# Altium PCB PCB.PcbDoc
Units mil, origin at the board's own origin, x right, y up, seen from the top; angles counter-clockwise.
Board outline 2007.87 x 1771.65 mil, 2 copper layers (Top Layer, Bottom Layer); 44 components, 59 nets, 178 pads, 19 vias.
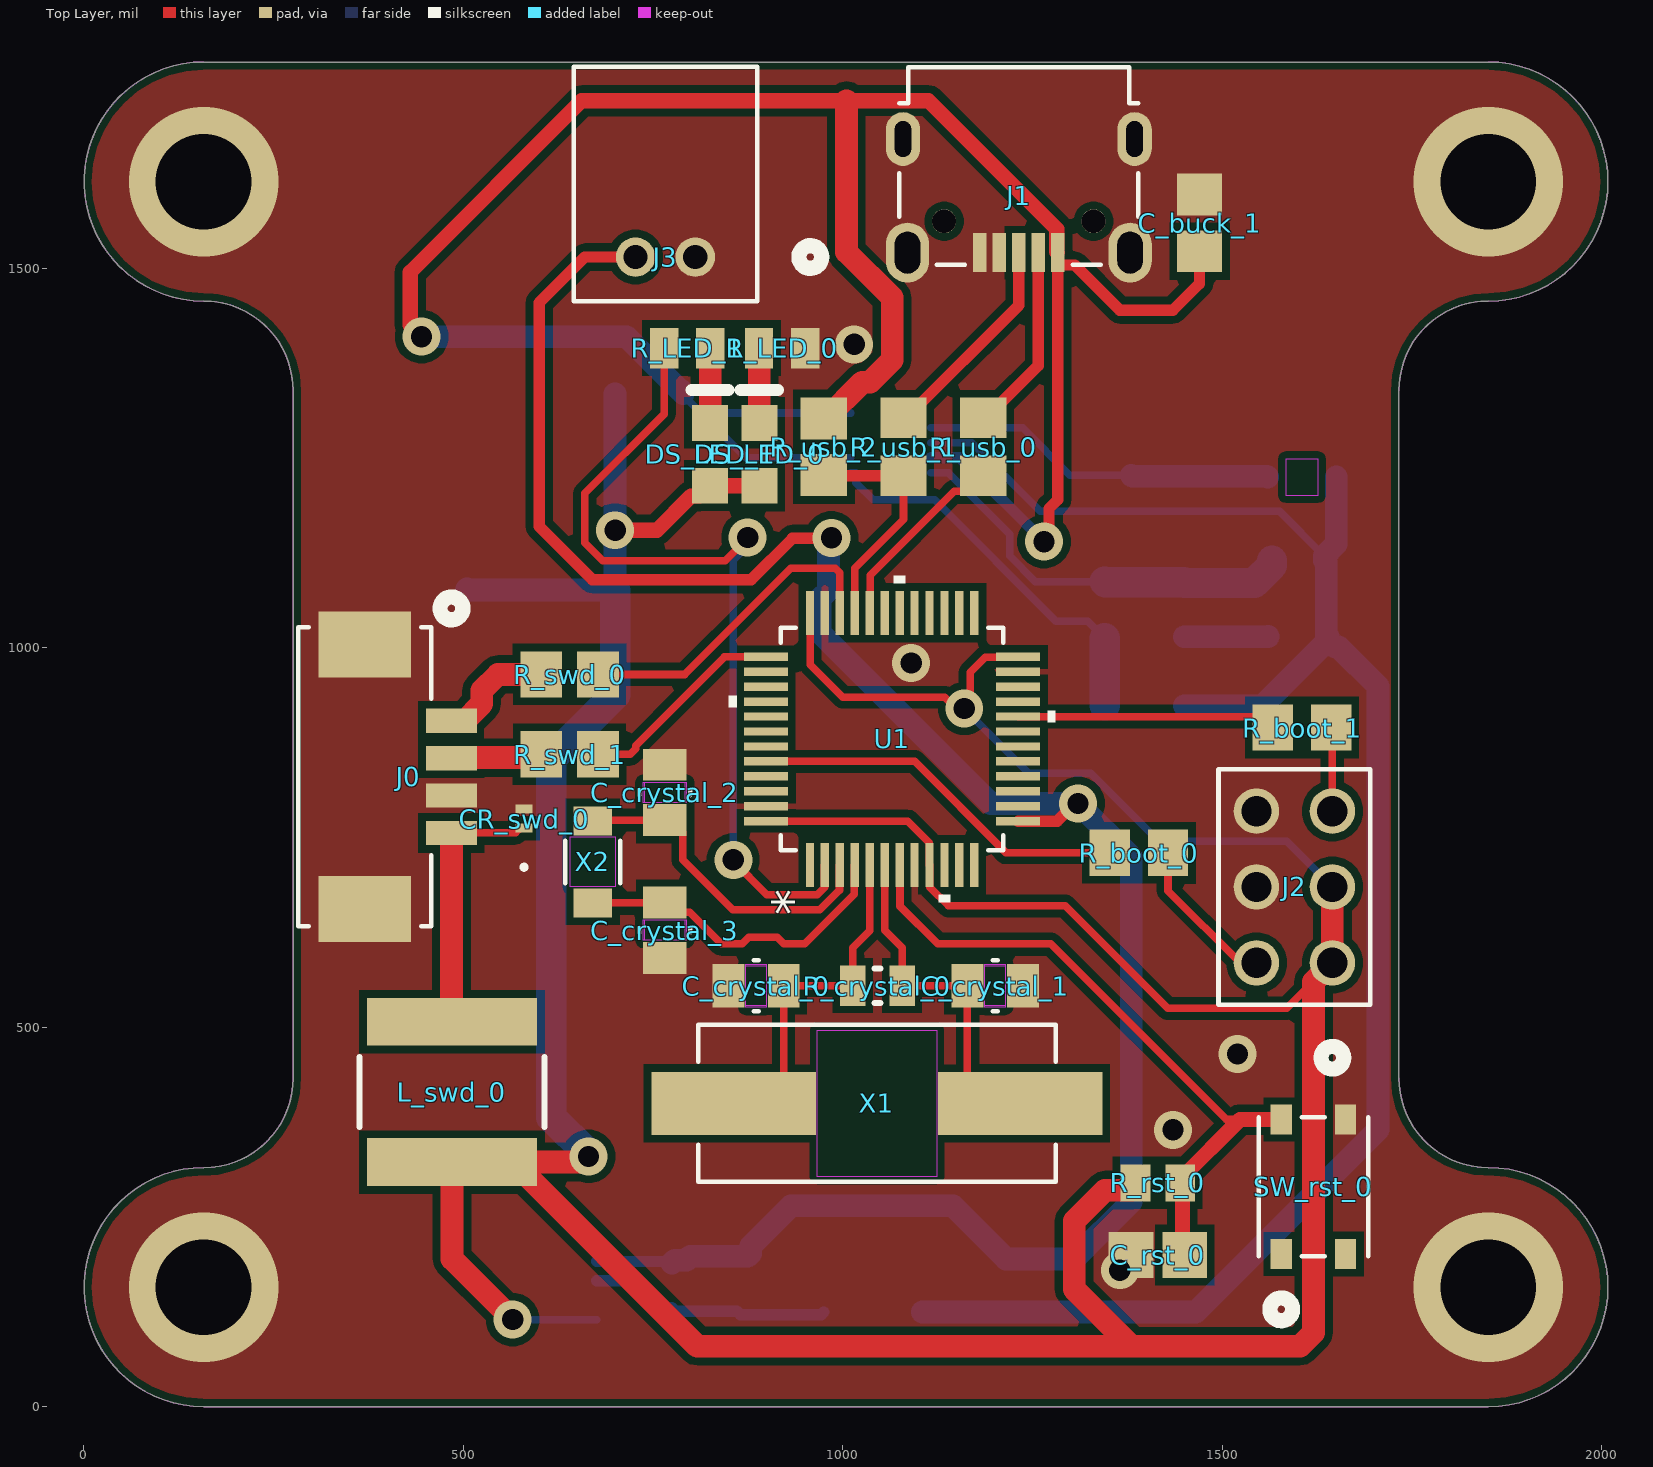
[diagram p0: Top Layer view]
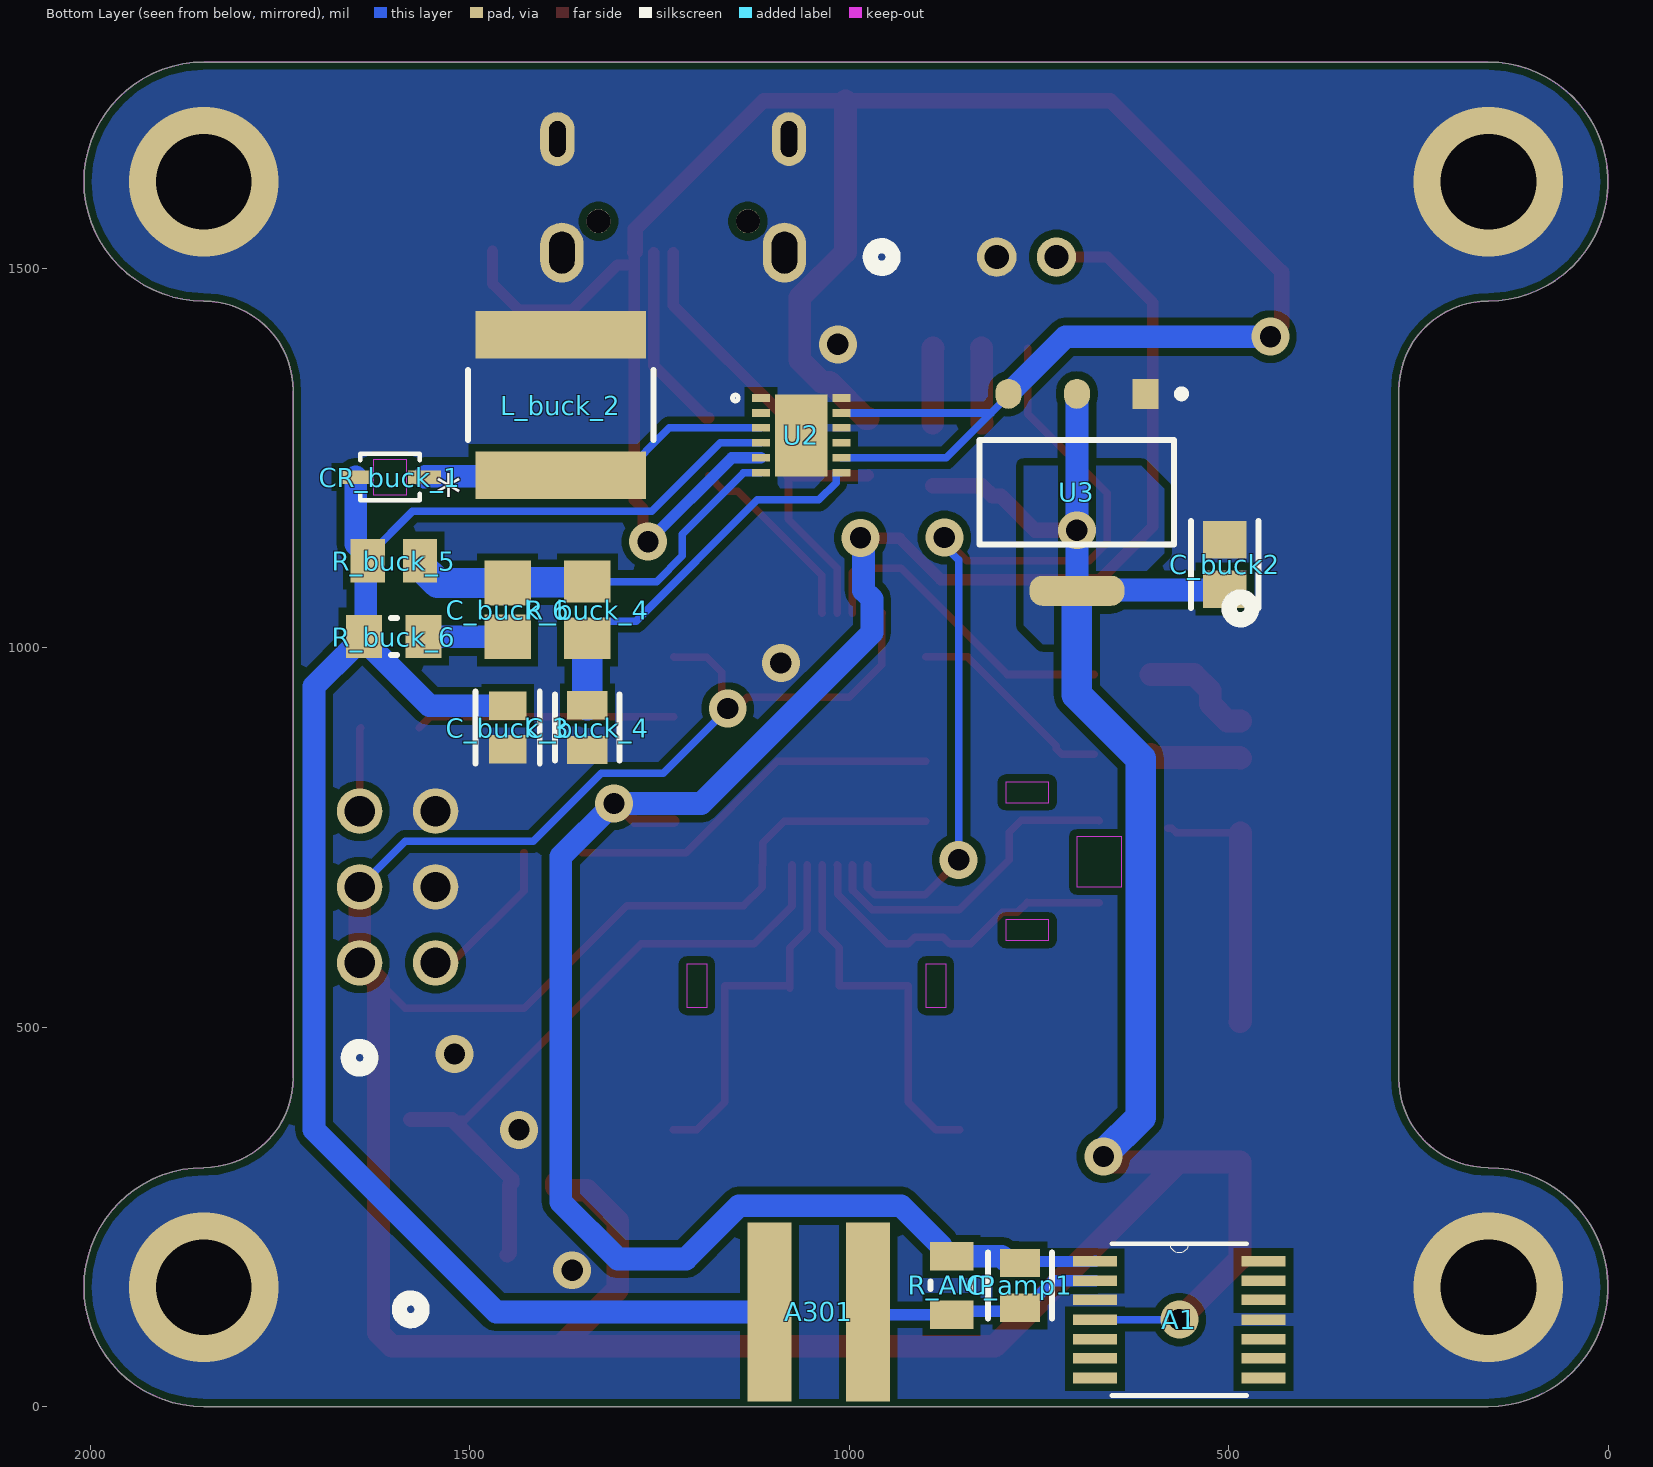
[diagram p1: Bottom Layer view, seen from below]
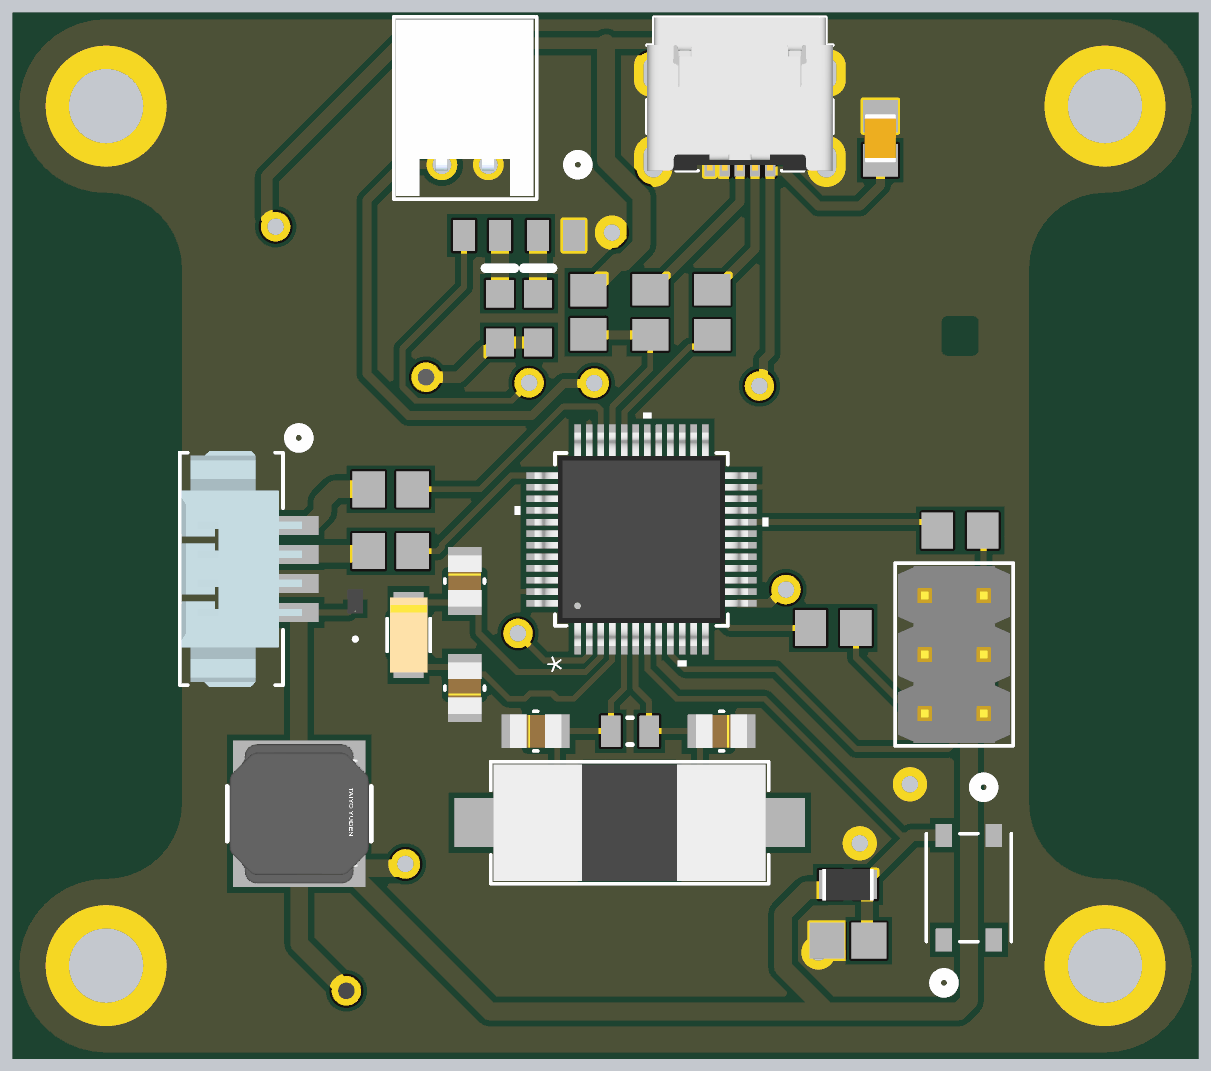
[diagram p2: 3D render of the assembled board from above, using the file's embedded part models]
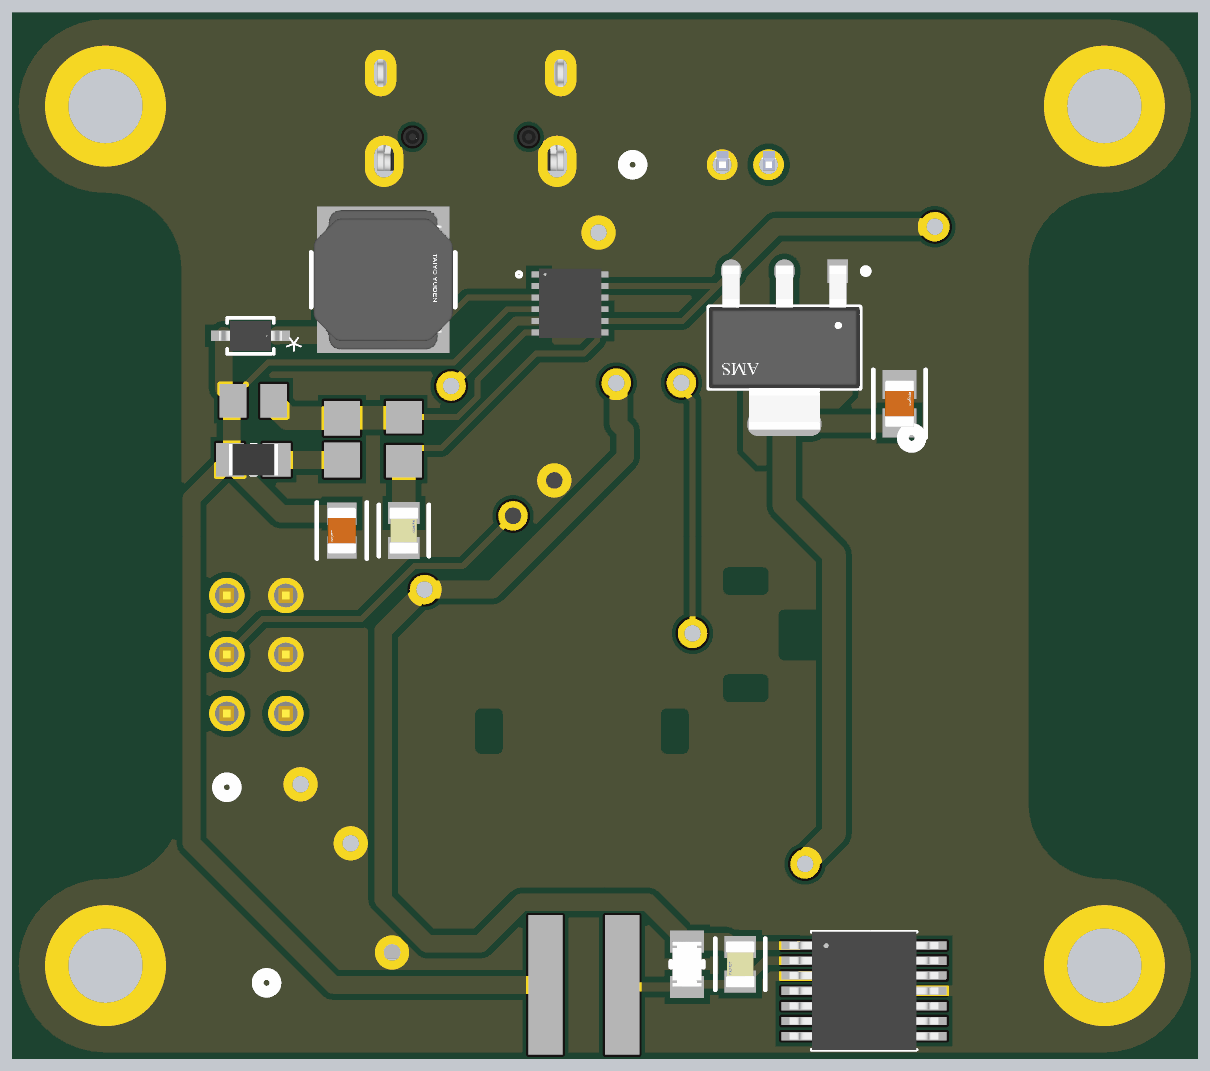
[diagram p3: 3D render of the assembled board from below, using the file's embedded part models]

## Layer stack, top to bottom
Top Solder: solder mask 0.4, Solder Resist, Dk 3.5
Top Layer: signal copper 1.4
Dielectric 1: dielectric 12.6, FR-4, Dk 4.8
Bottom Layer: signal copper 1.4
Bottom Solder: solder mask 0.4, Solder Resist, Dk 3.5

## Board outline
157.73,0.25 cw(c157.73,157.73) 157.73,315.21 ccw(c157.73,433.32) 275.84,433.32 275.84,1338.83 ccw(c157.73,1338.83) 157.73,1456.94 cw(c157.73,1614.42) 157.73,1771.9 1850.64,1771.9 cw(c1850.64,1614.42) 1850.64,1456.94 ccw(c1850.64,1338.83) 1732.53,1338.83 1732.53,433.32 ccw(c1850.64,433.32) 1850.64,315.21 cw(c1850.64,157.73) 1850.64,0.25

## Design rules (kind name [scope] priority, off if disabled: settings)
BoardOutlineClearance [All] p1: gap=10 ignorepadtopadclearanceinfootprint=FALSE
Clearance [All] p1: gap=10 ignorepadtopadclearanceinfootprint=FALSE except(2: SMDPad-SMDPad SMDPad-Region; 5: Track-Track Track-SMDPad Track-THPad Track-Region)
MatchedLengths [InNet('PC14_XTAL_IN') OR InNet('PC15_XTAL_OUT')] p1: tolerance=1000 checknetsindiffpair=FALSE checkdiffpairvsdiffpair=TRUE checkxsignals=TRUE checkothers=TRUE
PlaneConnect [All] p1: planeconnectstyle=Direct reliefexpansion=20 reliefentries=4 reliefconductorwidth=10 reliefairgap=10
PolygonConnect [All] p1: connectstyle=Direct reliefconductorwidth=10 reliefentries=4 polygonreliefangle="90 Angle" airgapwidth=10
RoutingVias [All] p1: holewidth=28 width=50 viastyle="Through Hole" minholewidth=28 minwidth=50 maxholewidth=28 maxwidth=50
SolderMaskExpansion [All] p1: expansion=4 istentingtop=FALSE
SupplyNets "Schematic Supply Nets_2" [InNet('+5')] p1: voltage=0.000
SupplyNets "Schematic Supply Nets_1" [InNet('GND')] p2: voltage=0.000
SupplyNets "Schematic Supply Nets" [InNet('3v3')] p3: voltage=0.000
Width [(InNet('3v3') OR InNet('+5'))] p1: maxlimit=40 minlimit=10 preferedwidth=20 minimp=50.000000 maximp=50.000000 favimp=50.000000
Width Width_1 [Not (InNet('3v3') OR InNet('+5') OR InNet('GND'))] p2: maxlimit=40 minlimit=10 preferedwidth=10
29 further rules are at their usual default settings.

## Components (designator, comment, footprint, x,y, rotation, side; value= is the part's Value field where it differs from the comment)
A1 "MCP6004" SOP65P640X120-14N 565,115 r180 bottom
A301 "A301-1" A301-1 1040,125 r180 bottom
C_amp1 "C0805C470J5GACTU 47pf" FP-C0805C-DN-MFG 775,160 r90 bottom value="47 pF"
C_buck2 "GRM21BR61E226ME44L 22uF" FP-GRM21B-0_2-e0_2_0_7-IPC_B 505,1110 r90 bottom
C_buck_1 "GRM21BR61C475KA88L 4.7uF" CAPC2013X135X45LL10T25 1470,1560 r270 top
C_buck_3 "GRM21BR61C106KE15L 10uF" FP-GRM21B-0_1-IPC_C 1450,895 r270 bottom
C_buck_4 "C0805C104J8RACTU" FP-C0805C-DN-MFG 1345,895 r270 bottom value="0.10 μF"
C_buck_6 "08055F152KAT2A" CAPC2013X140X50ML20T25 1450,1050 r270 bottom
C_crystal_0 "CML0805C0G200JT50V 20pf" CAP_CML_0805_.3pF-1500pF,4700pF_STP 885.75,555 r0 top
C_crystal_1 "CML0805C0G200JT50V 20pf" CAP_CML_0805_.3pF-1500pF,4700pF_STP 1200.71,555 r180 top
C_crystal_2 "CML0805C0G200JT50V 20pf" CAP_CML_0805_.3pF-1500pF,4700pF_STP 765.5,809.5 r270 top
C_crystal_3 "CML0805C0G200JT50V 20pf" CAP_CML_0805_.3pF-1500pF,4700pF_STP 765.5,628 r90 top
C_rst_0 "1uF" CAPC2013X140X50ML20T25 1415,200 r0 top
CR_buck_1 "CUS08F30,H3F" USC_TOS 1605,1225 r0 bottom
CR_swd_0 "PESD5V0F1BLD,315" DFN1006D-2_SOD882D_NEX 580,775 r90 top
DS_LED_0 "HSMG-C170" AVAG-HSMX-C170_V 890,1255 r90 top
DS_LED_1 "HSMG-C170" AVAG-HSMX-C170_V 825,1255 r90 top
J0 "532610471" CONN_532610001-SD_04_MOL 370,830 r90 top
J1 "629105150521" 629105150521 1231.85,1635 r180 top
J2 "67997-206HLF" 6Pins_AMP 1645,585 r90 top
J3 "S2B-PH-K-SLFSN" CONN_S2B-PH-K-S_JST 805.59,1515 r180 top
L_buck_2 "NR6028T4R7M 4.7uH" FP-NR6028-MFG 1380,1320 r270 bottom
L_swd_0 "NR6028T4R7M 4.7uH" FP-NR6028-MFG 485,415 r270 top
R_AMP "CRCW08052K00JNEA 2k ohm" FP-CRCW0805-e3-MFG 865,160 r90 bottom
R_boot_0 "100kohm" RESC2013X70X40ML20T20 1390,730 r180 top
R_boot_1 "100kohm" RESC2013X70X40ML20T20 1605,895 r180 top
R_buck_4 "12kohm" RESC2013X60X40ML20T25 1345,1050 r90 bottom
R_buck_5 "9.1kohm" RESC2013X70X40NL20T20 1600,1115 r0 bottom
R_buck_6 "1kOhm" RESC2013X60X35ML10T20 1600,1015 r0 bottom
R_crystal_0 "1mohm" RESC2013X50X30LL20T20 1045.59,555 r0 top
R_LED_0 "ERJ-6GEYJ681V" RESC2013X70X40LL20T20 920,1395 r0 top
R_LED_1 "ERJ-6GEYJ681V" RESC2013X70X40LL20T20 795,1395 r180 top
R_rst_0 "10kohm" RESC2013X60X40LL20T25_A 1415,295 r180 top
R_swd_0 "100ohm" RESC2013X60X40ML20T25 640,965 r0 top
R_swd_1 "100ohm" RESC2013X60X40ML20T25 640,860 r0 top
R_usb_0 "20ohm" RESC2013X70X40ML20T20 1185,1265 r90 top
R_usb_1 "20ohm" RESC2013X70X40ML20T20 1080,1265 r90 top
R_usb_2 "4.7kohm" RESC2013X60X40ML20T25 975,1265 r270 top
SW_rst_0 "PTS815 SJM 250 SMTR LFS" "SW4_PTS815 SJM 250 SMTR LFS_CNK" 1620,290 r90 top
U1 "STM32F103C8T6" LQFP48_STM 1065,880 r90 top
U2 "R1283K001C-TR" PE-DFNPL2730-12-180404_NMD 1063.23,1280 r180 bottom
U3 "AMS1117-3.3" FP-AMS1117-IPC_C 700,1205 r270 bottom
X1 "FOXSDLF080-20" CRYSTAL_HC49SDLF_FXT 1045,400 r0 top
X2 "ECS-.327-12.5-34B-TR" XTAL_ECS-31B_ECS 670.5,718 r270 top

## Footprints (in the part's own frame and the unit in brackets; to place one, negate y for a bottom-side part, rotate by r counter-clockwise, add the part's x,y. Pads: shape width x height; smd on the part's side, far side on the other; paste and mask are expansions set on the pad)
6Pins_AMP [mil]
  round 60 hole 40 paste-99999 mask+0: 1(0,0) 2(100,0) 3(200,0) 4(0,100) 5(100,100) 6(200,100)
  silkscreen extent -140,-50 255,150, body extent -50,-45 250,145, height 331
629105150521 [mm] "Micro USB 2.0 SMT Type B Horizontal 5 Contacts High Current"
  rect 0.45x1.3 smd: 1(-1.3,2.9) 2(-0.65,2.9) 3(0,2.9) 4(0.65,2.9) 5(1.3,2.9)
  round 0.8 hole 0.8 unplated: MH1(-2.5,1.85) MH2(2.5,1.85)
  oval 1.15x1.8 hole 0.55 slot 1.2 at 90 deg: Shell(-3.875,-0.9) Shell(3.875,-0.9)
  oval 1.45x2 hole 0.85 slot 1.4 at 90 deg: Shell(-3.725,2.9) Shell(3.725,2.9)
  silkscreen extent -4,-3.3 4,3.3, body extent -4,-3.3 4,3.3, height 2.75
A301-1 [mil]
  rect 58x236.22 smd: 0(-65,0) 1(65,0)
AVAG-HSMX-C170_V [mm] "SMD, 2-Leads, Body 2x1.25mm, Height 0.8mm"
  rect 1.2x1.2 smd: 1(-1.05,0) 2(1.05,0)
  silkscreen extent 2.15,-0.62 2.15,0.62, body extent -1,-0.63 1,0.63, height 0.8
CAP_CML_0805_.3pF-1500pF,4700pF_STP [mil]
  rect 42x57 smd paste+0 mask+0: 1(-36.5,0) 2(36.5,0)
  Top Layer keep-out region: -13.5,-26.5 -13.5,26.5 13.5,26.5 13.5,-26.5
  Keep-Out Layer region: -13.5,-28.5 -13.5,28.5 13.5,28.5 13.5,-28.5
  silkscreen extent -3,-34 3,34, body extent -44,-29 44,29, height 30
CAPC2013X135X45LL10T25 [mm] "Chip Capacitor, 2-Leads, Body 2.10x1.35mm, IPC High Density"
  rect 1.4x1.5 smd: 1(-0.95,0) 2(0.95,0)
  body extent -1.05,-0.67 1.05,0.67, height 1.35
CAPC2013X140X50ML20T25 [mm] "Chip Capacitor, 2-Leads, Body 2.00x1.25mm, IPC Low Density"
  rect 1.5x1.55 smd: 1(-0.9,0) 2(0.9,0)
  body extent -1.1,-0.72 1.1,0.72, height 1.4
CONN_532610001-SD_04_MOL [mil]
  rect 32x67 smd paste+0 mask+0: 1(73.82,-114.35) 2(24.61,-114.35) 3(-24.61,-114.35) 4(-73.82,-114.35)
  rect 87x122 smd paste-61 mask-61: 5(-174.21,-0.18) 6(174.21,-0.18)
  silkscreen extent -197,-129 237,88, body extent -200,-120 200,85, height 133
CONN_S2B-PH-K-S_JST [mil]
  round 52 / inner round 60 / far side round 52 hole 32 paste-99999 mask+0: 1(0,0) 2(78.74,0)
  silkscreen extent -167,-251 160,58, body extent -76,-246 156,53, height 189
CRYSTAL_HC49SDLF_FXT [mil]
  rect 216.5x83 smd paste+0 mask+0: 1(-188.75,0) 2(188.75,0)
  Top Layer keep-out region: -78.5,-96.5 -78.5,96.5 78.5,96.5 78.5,-96.5
  silkscreen extent -236,-104 235,104, body extent -231,-99 231,99, height 177
DFN1006D-2_SOD882D_NEX [mil]
  rect 12x22 smd paste+0 mask-1: 1(-12.5,0) 2(12.5,0)
  silkscreen extent -67,-3 -61,3, body extent -21,-13 21,13, height 16
FP-AMS1117-IPC_C [mm]
  rect 1.004x0.872 smd paste+0 mask+0: 1(-3.295,2.29)
  rrect100% 1.004x0.872 smd paste+0 mask+0: 2(-3.295,0) 3(-3.295,-2.29)
  rrect87% 1.004x3.182 smd paste+0 mask+0: 4(3.295,0)
  silkscreen extent -3.42,-3.25 1.75,3.62, body extent -3.53,-3.25 3.53,3.25, height 1.8
FP-C0805C-DN-MFG [mm]
  rect 0.95x1.35 smd paste+0 mask+0: 1(-0.75,0) 2(0.75,0)
  silkscreen extent -1.1,-1.07 1.1,1.07, body extent -1,-0.63 1,0.63, height 0.88
FP-CRCW0805-e3-MFG [mm]
  rect 0.95x1.45 smd paste+0 mask+0: 1(-0.975,0) 2(0.975,0)
  silkscreen extent -0.13,-0.7 0.13,0.7, body extent -1,-0.63 1,0.63, height 0.5
FP-GRM21B-0_1-IPC_C [mil]
  rect 37.71x49.69 smd paste+0 mask+0: 1(-28.63,0) 2(28.63,0)
  silkscreen extent -47,-42 47,42, body extent -39,-25 39,25, height 53
FP-GRM21B-0_2-e0_2_0_7-IPC_B [mil]
  rect 49.4x57.33 smd paste+0 mask+0: 1(-32.51,0) 2(32.51,0)
  silkscreen extent -57,-44 57,44, body extent -39,-25 39,25, height 57
FP-NR6028-MFG [mm]
  rect 1.6x5.7 smd paste+0 mask+0: 1(-2.35,0) 2(2.35,0)
  silkscreen extent -1.18,-3.1 1.18,3.1, body extent -3,-3 3,3, height 2.8
LQFP48_STM [mil]
  rect 58x11 smd paste+0 mask+0: 1(-166,108.27) 2(-166,88.58) 3(-166,68.9) 4(-166,49.21) 5(-166,29.53) 6(-166,9.84) 7(-166,-9.84) 8(-166,-29.53) 9(-166,-49.21) 10(-166,-68.9) 11(-166,-88.58) 12(-166,-108.27) 25(166,-108.27) 26(166,-88.58) 27(166,-68.9) 28(166,-49.21) 29(166,-29.53) 30(166,-9.84) 31(166,9.84) 32(166,29.53) 33(166,49.21) 34(166,68.9) 35(166,88.58) 36(166,108.27)
  rect 11x58 smd paste+0 mask+0: 13(-108.27,-166) 14(-88.58,-166) 15(-68.9,-166) 16(-49.21,-166) 17(-29.53,-166) 18(-9.84,-166) 19(9.84,-166) 20(29.53,-166) 21(49.21,-166) 22(68.9,-166) 23(88.58,-166) 24(108.27,-166) 37(108.27,166) 38(88.58,166) 39(68.9,166) 40(49.21,166) 41(29.53,166) 42(9.84,166) 43(-9.84,166) 44(-29.53,166) 45(-49.21,166) 46(-68.9,166) 47(-88.58,166) 48(-108.27,166)
  silkscreen extent -215,-215 215,215, body extent -181,-181 181,181, height 63
PE-DFNPL2730-12-180404_NMD [mil]
  rect 24x10 smd paste+0 mask+0: 1(-53,49.21) 2(-53,29.53) 3(-53,9.84) 4(-53,-9.84) 5(-53,-29.53) 6(-53,-49.21) 7(53,-49.21) 8(53,-29.53) 9(53,-9.84) 10(53,9.84) 11(53,29.53) 12(53,49.21)
  rect 69x108 smd paste+0 mask+0: 13(0,0)
  silkscreen extent -91,45 -83,53, body extent -53,-59 53,59, height 24
RESC2013X50X30LL20T20 [mm] "Chip Resistor, 2-Leads, Body 2.00x1.25mm, IPC High Density"
  rect 0.85x1.35 smd: 1(-0.825,0) 2(0.825,0)
  silkscreen extent -0.1,-0.58 0.1,0.58, body extent -1.1,-0.72 1.1,0.72, height 0.5
RESC2013X60X35ML10T20 [mm] "Chip Resistor, 2-Leads, Body 2.1x1.35mm, IPC Low Density"
  rect 1.2x1.45 smd: 1(-1,0) 2(1,0)
  silkscreen extent -0.1,-0.62 0.1,0.62, body extent -1.05,-0.68 1.05,0.67, height 0.6
RESC2013X60X40LL20T25_A [mm] "Chip Resistor, 2-Leads, Body 2.20x1.35mm, IPC High Density"
  rect 1x1.25 smd: 1(-0.75,0) 2(0.75,0)
  body extent -1.1,-0.67 1.1,0.67, height 0.6
RESC2013X60X40ML20T25 [mm] "Chip Resistor, 2-Leads, Body 2.00x1.25mm, IPC Low Density"
  rect 1.4x1.55 smd: 1(-0.95,0) 2(0.95,0)
  body extent -1.1,-0.72 1.1,0.72, height 0.6
RESC2013X70X40LL20T20 [mm] "Chip Resistor, 2-Leads, Body 2.00x1.25mm, IPC High Density"
  rect 0.95x1.35 smd: 1(-0.775,0) 2(0.775,0)
  body extent -1.1,-0.72 1.1,0.72, height 0.7
RESC2013X70X40ML20T20 [mm] "Chip Resistor, 2-Leads, Body 2.00x1.25mm, IPC Low Density"
  rect 1.35x1.55 smd: 1(-0.975,0) 2(0.975,0)
  body extent -1.1,-0.72 1.1,0.72, height 0.7
RESC2013X70X40NL20T20 [mm] "Chip Resistor, 2-Leads, Body 2.00x1.25mm, IPC Medium Density"
  rect 1.15x1.45 smd: 1(-0.875,0) 2(0.875,0)
  body extent -1.1,-0.72 1.1,0.72, height 0.7
SOP65P640X120-14N [mil]
  rect 58x14 smd: 1(-111,77) 2(-111,51) 3(-111,26) 4(-111,0) 5(-111,-26) 6(-111,-51) 7(-111,-77) 8(111,-77) 9(111,-51) 10(111,-26) 11(111,0) 12(111,26) 13(111,51) 14(111,77)
  silkscreen extent -89,-100 89,100, body extent -126,-100 126,100, height 47
"SW4_PTS815 SJM 250 SMTR LFS_CNK" [mil]
  rect 39x28 smd paste+0 mask+0: 1(-88.58,42.32) 2(88.58,42.32) 3(-88.58,-42.32) 4(88.58,-42.32)
  silkscreen extent -176,-72 91,72
USC_TOS [mm]
  rect 1.111x0.451 smd paste+0 mask+0: 1(-1.15,0) 2(1.15,0)
  Keep-Out Layer region: -0.544,-0.599 -0.544,0.599 0.544,0.599 0.544,-0.599
  silkscreen extent -1,-0.78 1,0.78, body extent -1.35,-0.65 1.35,0.65, height 1.1
XTAL_ECS-31B_ECS [mil]
  rect 38x51 smd paste+0 mask+0: 1(-54,0) 2(54,0)
  Top Layer keep-out region: -33,-29.5 -33,29.5 33,29.5 33,-29.5
  Keep-Out Layer region: -33,-29.5 -33,29.5 33,29.5 33,-29.5
  silkscreen extent -28,-37 28,37, body extent -63,-31 63,31, height 35

## Part data
C_amp1: library part CMP-2007-00435-2, "CAP CER 47PF 50V C0G/NP0 0805", Capacitance="47 pF", Manufacturer=KEMET, Manufacturer Part Number=C0805C470J5GACTU, Package=C0805C-DN, Temperature="-55°C to +125°C", Temperature Characteristic=C0G, Temperature Coefficient=30ppm/°C, Temperature Range High=+125°C, Temperature Range Low=-55°C, Tolerance=0.05, Voltage Rating="50 V", Automotive=No, Category=Cap, ComponentLink2Description=Datasheet, ComponentLink2URL=https://content.kemet.com/datasheets/KEM_C1003_C0G_SMD.pdf, Device Class L1="Passive Components", Device Class L2=Capacitors, Device Class L3="Ceramic Capacitors", Digikey Description="CAP CER 47PF 50V C0G/NP0 0805", Height=0.88mm, Ipc Land Pattern Name=CAPC200125X78, Lead Free=Yes, Material=Ceramic, Mouser Description="Multilayer Ceramic Capacitors MLCC - SMD/SMT 50volts 47pF C0G 5%", Octopart=https://octopart.com/c0805c470j5gactu-kemet-150274, RoHS=TRUE
C_buck2: library part CMP-2007-03222-3, "Chip Multilayer Ceramic Capacitors for General Purpose, 0805, 22uF, X5R, 15%, 20%, 25V", Capacitance=22uF, Case Code (Imperial)=0805, Case Code (Metric)=2012, Dielectric=X5R, Max Operating Temperature=85°C, Min Operating Temperature=-55°C, Package Quantity=3000, Resistor Type=Ceramic, Tolerance=20%, Voltage=25V, Case/Package=0805, Depth=1.25mm, Height=1.25mm, Lead Free="Lead Free", Length=2mm, Material=Ceramic, Mount="Surface Mount", Packaging="Tape and Reel", REACH SVHC="No SVHC", Termination=SMD/SMT, Thickness=0.057inch, Voltage Rating=25V, Voltage Rating (DC)=25V, Weight=0.000335oz, Width=1.25mm
C_buck_1: library part CMP-1662-00015-2, "Chip Capacitor, 4.7 uF, +/- 10%, 16 V, -55 to 85 degC, 0805 (2012 Metric), RoHS, Tape and Reel", Capacitance="4.7 uF", Case Code (Imperial)=0805, Case Code (Metric)=2012, Max Operating Temperature="85 degC", Min Operating Temperature="-55 degC", Package Quantity=3000, PartNumber=GRM21BR61C475KA88L, Tolerance=10%, Type (Capacitors)=X5R, Voltage Rating="16 V", Case\/Package=0805, ComponentLink1Description="Manufacturer URL", ComponentLink1URL=http://www.murata.com/, ComponentLink2Description=Datasheet, ComponentLink2URL=http://search.murata.co.jp/Ceramy/image/img/A01X/G101/ENG/GRM21BR61C475KA88-01.pdf, DatasheetVersion=03/2016, Height="1.25 mm", Length="2 mm", Mount="Surface Mount", Mounting Technology="Surface Mount", PackageDescription="2-Pin Surface Mount Device, Body 2 x 1.25 mm", PackageReference=0805, Packaging="Tape and Reel", Pins=2, Radiation Hardening=No, REACH SVHC="No SVHC", RoHSCompliant=true, Voltage Rating (DC)="16 V", Width="1.25 mm"
C_buck_3: library part CMP-2007-03453-2, "Chip Multilayer Ceramic Capacitors for General Purpose, 0805, 10uF, X5R, 15%, 10%, 16V", Capacitance=10uF, Case Code (Imperial)=0805, Case Code (Metric)=2012, Dielectric=X5R, Max Operating Temperature=85°C, Min Operating Temperature=-55°C, Package Quantity=1, Tolerance=10%, Voltage=16V, Case/Package=0805, Depth=1.25mm, Height=1.25mm, Lead Free="Lead Free", Length=2mm, Material=Ceramic, Mount="Surface Mount", Packaging="Tape and Reel", Radiation Hardening=No, REACH SVHC="No SVHC", Termination=SMD/SMT, Thickness=0.053inch, Voltage Rating=16V, Voltage Rating (DC)=16V, Width=1.25mm
C_buck_4: library part CMP-03020-032188-1, "CAP CER 0.1UF 10V 5% X7R 0805", Capacitance="0.10 μF", Manufacturer=KEMET, Package=C0805C-DN, Temperature="-55°C to +125°C", Temperature Characteristic=X7R, Temperature Coefficient=30ppm/°C, Temperature Range High=+125°C, Temperature Range Low=-55°C, Tolerance=0.05, Voltage Rating="10 V", Automotive=No, Category=Cap, ComponentLink2Description=Datasheet, ComponentLink2URL=https://content.kemet.com/datasheets/KEM_C1003_C0G_SMD.pdf, Device Class L1="Passive Components", Device Class L2=Capacitors, Device Class L3="Ceramic Capacitors", Digikey Description="CAP CER 0.1UF 10V 5% X7R 0805", Height=0.88mm, Ipc Land Pattern Name=CAPC200125X78, Lead Free=Yes, Manufacturer Part Number=C0805C104J8RACTU, Material=Ceramic, Mouser Description="Multilayer Ceramic Capacitors MLCC - SMD/SMT 10volts 0.1uF X7R 5%", Octopart=https://octopart.com/c0805c104j8ractu-kemet-11807087, RoHS=TRUE
C_buck_6: library part CMP-2007-04787-1, Manufacturer="AVX Interconnect / Elco", Part Number=08055F152KAT2A
C_crystal_0 C_crystal_1 C_crystal_2 C_crystal_3: library part CML0805C0G200JT50V, "No Description Available", Mfr_Name="Stackpole International"
C_rst_0: library part CMP-2007-03236-1, Manufacturer=Kemet, Part Number=C0805C105K5RACTU
CR_buck_1: "No Description Available", Mfr_Name="Toshiba Electronic Devices & Storage Corp."
CR_swd_0: "No Description Available", Mfr_Name=Nexperia, RefDes=RefDes, Type=Type
DS_LED_0 DS_LED_1: library part CMP-2000-05062-1, "Chip LED, Green, 2.2 V, -40 to 85 degC, 2-Pin SMD, Pb-Free, Tape and Reel", Forward Current If=20mA, Forward Voltage=2.2V, Forward Voltage VF Max=2.6V, LED Colour=Green, Manufacturer=Avago, Operating Temperature Max=85degC, Operating Temperature Min=-30degC, Operating Temperature Range=-30degCto+85degC, Opto Case Style=SMD, Package Description="2-Pin Surface Mount Device, Body 2 x 1.25 mm, Height 0.8 mm", Package Reference=HSMX-C170, Storage Temperature Min=-40degC, Bulb Size=1.25mmx1.4mm, Datasheet URL=https://datasheet.ciiva.com/29280/180495-da-01-en-chip-led-hsmg-c170-gelb-gruen-29280971.pdf, Datasheet Version=Oct-08, Dominant Wavelength=572nm, Dominant Wavelength Typ=572nm, External Depth=0.8mm, External Length / Height=2mm, External Width=1.25mm, Forward Current If Max=20mA, LED Mounting=SMD, LED Type=Standard, Lens Shape=Rectangular, Light Area Height=1mm, Luminous Intensity=15mcd, Luminous Intensity Min=4mcd, Luminous Intensity Typ=15mcd, Manufacturer URL=http://www.avagotech.com/, Mounting Type=SMD, MSL=MSL2A-4weeks, No. of Pins=2, Opto Mounting Orientation=Top, Packaging=CutTape, Peak Forward Current=20mA, Peak Wavelength=570nm, PIV Max=5V, Storage Temperature Max=85degC, SVHC=NoSVHC(16-Jun-2014), Viewing Angle=170deg, Voltage Vf Typ=2.2V, Wavelength Typ=570nm
J0: "No Description Available", Mfr_Name="Molex Connector Corporation", RefDes=RefDes, Type=Type
J1: library part CMP-1502-03252-3, Contact Resistance=30mΩ, Current Rating=3A, Insulation Resistance=1GΩ, Max Operating Temperature=85°C, Min Operating Temperature=-40°C, Operating Supply Voltage=30V, Connector Type=USB, Contact Material=Gold, Contact Plating=Gold, Features=Shielded, Gender=Receptacle, Height=2.86mm, Lead Free="Lead Free", Mount="Horizontal, Surface Mount", NexarPartId=52645113, Number of Contacts=5, Number of Pins=5, Orientation=Horizontal, Packaging="Tape and Reel", REACH SVHC=Unknown, RoHS=Compliant, Termination=SMD/SMT, USB Standard="USB 2.0", Voltage Rating=30V
J2: "No Description Available", Mfr_Name="Amphenol ICC", RefDes=RefDes, Type=Type
J3: "No Description Available", Mfr_Name=JST, RefDes=RefDes, Type=Type
L_buck_2 L_swd_0: library part CMP-14484-000037-2, "SMD Power Inductors 4.7uH ±20% 2.7A 40.3mΩ", Case/Package=2424, Current Rating=3A, DC Resistance (DCR)=40.3mR, Inductance=4.7uH, Inductance Tolerance=20%, Max Operating Temperature=120°C, Min Operating Temperature=-25°C, Package Quantity=2000, Resistor Type=Wirewound, Saturation Current=2.7A, Self Resonant Frequency=39MHz, Test Frequency=100kHz, Core Material=Ferrite, Depth=6.2mm, Halogen Free="Halogen Free", Height=2.8mm, Height - Seated (Max)=0.11inch, Lead Free="Lead Free", Length=0.236inch, Max DC Current=3A, Mount="Surface Mount", Number of Pins=2, Packaging="Tape and Reel", Radiation Hardening=No, RMS Current (Irms)=3A, RoHS Compliant=Yes, Series=NR, Shielding=Shielded, Termination=SMD/SMT, Tolerance=20%, Width=0.236inch
R_AMP: library part CMP-2001-03757-2, "RES Thick Film, 2kΩ, 5%, 0.125W, 200ppm/°C, 0805", Case Code (Imperial)=0805, Case Code (Metric)=2012, Max Operating Temperature=155°C, Max Power Dissipation=125mW, Min Operating Temperature=-55°C, Package Quantity=1, Resistance=2kR, Temperature Coefficient=200ppm/°C, Tolerance=5%, Voltage Rating=150V, Case/Package=0805, Composition="Thick Film", Contact Plating=Tin, Depth=1.25mm, Features="Automotive AEC-Q200", Height=0.02inch, Lead Free="Lead Free", Length=2mm, Military Standard=Not, Number of Pins=2, Number of Terminations=2, Packaging="Tape and Reel", Power Rating=125mW, Radiation Hardening=No, Termination=SMD/SMT, Voltage Rating (DC)=150V, Weight=0.000194oz, Width=0.049inch
R_boot_0 R_boot_1: library part CMP-2001-04377-1, Manufacturer=Panasonic, Part Number=ERJ-6ENF1003V
R_buck_4: library part CMP-2001-00590-1, Manufacturer=Panasonic, Part Number=ERA6AEB123V
R_buck_5: library part CMP-2001-00577-1, Manufacturer=Panasonic, Part Number=ERJ6ENF9101V
R_buck_6: library part CMP-2100-03671-1, "Chip Resistor, 1 KOhm, +/- 1%, 125 mW, -55 to 155 degC, 0805 (2012 Metric), RoHS, Tape and Reel", Case Code (Imperial)=0805, Case Code (Metric)=2012, Manufacturer=Yageo, Max Operating Temperature=155degC, Max Power Dissipation=125mW, Min Operating Temperature=-55degC, Package Description="2-Pin Surface Mounted Device, Body 2 x 1.25 mm", Package Quantity=1, Resistance=1KOhm, Temperature Coefficient=100ppm/degreesC, Tolerance=1%, Voltage Rating=150V, Case/Package=0805, Composition=ThickFilm, Datasheet URL=http://www.yageo.com/NewPortal/yageodocoutput?fileName=/pdf/R-Chip/PYu-RC_Group_51_RoHS_L_5.pdf, Datasheet Version="Rev. 5, 10/2016", Depth=1.25mm, Height=0.024inch, Lead Free=LeadFree, Length=0.079inch, Manufacturer URL=http://www.yageo.com/, Military Standard=Not, Number of Pins=2, Number of Terminations=2, Package Reference=0805, Packaging=TapeandReel, Power Rating=125mW, REACH SVHC=Unknown, RoHSCompliant=true, Termination=SMD/SMT, Voltage Rating (DC)=150V, Width=0.049inch
R_crystal_0: library part CMP-2001-03632-1, Manufacturer="Vishay Dale", Part Number=CRCW08051M00JNEA
R_LED_0 R_LED_1: library part CMP-2001-00440-1, Manufacturer=Panasonic, Part Number=ERJ-6GEYJ681V
R_rst_0: library part CMP-2001-00582-2, "Metal Film Chip Resistor, High Reliability Type, 0.125 W, +/- 0.1%, -55 to 155 degC, 0805 (2012 Metric), RoHS, Tape and Reel", Case Code - in=0805, Case Code - mm=2012, Manufacturer=Panasonic, Operating Temperature Range=-55Cto+155C, Package / Case=0805(2012metric), Package Description="2-Pin Surface Mount Device, Body 2 x 1.25 mm", Power Rating=125mW(1/8W), Resistance=10kOhms, Temperature Coefficient=25PPM/C, Tolerance=0.1%, Voltage Rating=100V, Brand=Panasonic, Datasheet URL=https://industrial.panasonic.com/cdbs/www-data/pdf/RDM0000/AOA0000C307.pdf, Datasheet Version=02/2016, Factory Pack Quantity=5000, Height=0.5mm, Length=2mm, Manufacturer URL=http://www.panasonic.com/, Mounting Technology=SurfaceMount, Package Reference=0805, Packaging=Reel, Product=ThinFilmResistorsSMD, Product Category=ThinFilmResistors-SMD, RoHS=Details, Series=ERA-6A, Termination Style=SMD/SMT, Type=MetalFilmChipResistors, Width=1.25mm
R_swd_0 R_swd_1: library part CMP-2001-00580-1, Manufacturer=Panasonic, Part Number=ERA6AEB101V
R_usb_0 R_usb_1: library part CMP-1013-00316-2, Manufacturer=Panasonic, Part Number=ERJ-6ENF20R0V
R_usb_2: library part CMP-2001-00644-1, Manufacturer=Panasonic, Part Number=ERA6AEB472V
SW_rst_0: "No Description Available", Mfr_Name="C&K Components", RefDes=RefDes, Type=Type
U1: "No Description Available", Mfr_Name=STMicroelectronics, RefDes=RefDes, Type=Type
U2: "No Description Available", Mfr_Name="Nisshinbo Micro Devices", RefDes=RefDes, Type="Power Management"
U3: library part CMP-209535-000001-1, "LDO Voltage Regulators 1A, 3.3V", Dropout Voltage=1.1V, Manufacturer="Advanced Monolithic Systems", Max Junction Temp=+125°C, Max Power Dissipation=1.2W, Max Supply Voltage=15V, Nominal Supply Current=5mA, Output Current=1A, Output Voltage=3.3V, Package=AMS1117, Temperature="-40°C to +125°C", Temperature Range Low=-40°C, Automotive=No, Category=IC, ComponentLink2Description=Datasheet, ComponentLink2URL=http://www.advanced-monolithic.com/pdf/ds1117.pdf, Device Class L1="Integrated Circuits (ICs)", Device Class L2="Power Management ICs", Device Class L3="Voltage Regulators - Linear", Height=1.8mm, Ipc Land Pattern Name=SOT229P700X180-4, Lead Free=Yes, Manufacturer Part Number=AMS1117-3.3, Number Of Outputs=1, Octopart=https://octopart.com/ams1117-3.3-advanced+monolithic+systems-25899300, Output Type=Fixed, RoHS=TRUE, Standoff Height=0.64mm, Temperature Range High=+125°C
X1: "No Description Available", Mfr_Name=Fox, Digi-Key_Part_Number_1=631-1010-1-ND, Digi-Key_Part_Number_2=631-1010-2-ND, Digi-Key_Part_Number_3=631-1010-6-ND
X2: "No Description Available", Mfr_Name="ECS International"

## Via types
v1: diameter 50, hole 28, Top Layer to Bottom Layer, 15 vias
v2: diameter 196.85, hole 125.98, Top Layer to Bottom Layer, 4 vias

## Nets (pads, with @x,y where several pads share a name; then routed paths per layer and width w, separated by ;. In a path a pad name is that pad's centre, name@x,y a point inside that pad or via, vN(x,y) a via of type N, cw(c..) or ccw(c..) an arc to the next point about the centre after c; other vN are vias at no path point)
3v3: A1.4 C_buck2.1 DS_LED_0.1 DS_LED_1.1 J2.1 J2.2 L_swd_0.2 R_rst_0.2 U1.9 U1.24 U1.36 U1.48 U3.2 U3.4 | length 5936.5
  Top Layer w10: U1.48 1085.44,771.73 1113.71,743.46 1113.71,714.5 U1.9 1114.71,713.5 1114.71,684.54 1139.26,660 1292.91,660 1427.91,525 1585,525 1620,560 ; U1.36 957.23,1045.5 957.23,977.77 1000,935 1134.18,935 1149.18,920 v1(1160,920) 1167.65,927.65 1167.65,967.65 1187.77,987.77 1230.5,987.77 U1.24
  Top Layer w20: v1(700,1155) 755,1155 800.04,1200.04 811.38,1200.04 DS_LED_1.1 DS_LED_0.1
  Top Layer w30: v1(565,115) 485,195 L_swd_0.2 L_swd_0.2@565.71,322.48 ; v1(665,330) 659.59,330 652.07,322.48 L_swd_0.2@565.71,322.48 ; R_rst_0.2 1385.47,290.08 1380.79,285.39 1345.39,285.39 1305,245 1305,155 1380,80 ; J2.2 J2.1 1620,560 1620,97.57 1602.43,80 1380,80 ; L_swd_0.2@565.71,322.48 808.19,80 1380,80
  Bottom Layer w10: v1(565,115) A1.4 ; v1(1160,920) 1245,835 1326.57,835 1416.57,745 1585,745 J2.2
  Bottom Layer w30: C_buck2.1 506.11,1076.38 698.89,1076.38 U3.4 v1(700,1155) U3.2
  Bottom Layer w40: v1(665,330) 665,332.71 616,381.71 616,854.17 700,938.17 U3.4
+5: C_buck_1.2 J1.1 R_usb_2.1 U2.5 U2.8 U2.11 U3.3 | length 3307.6
  Top Layer w15: v1(1265,1140) 1271.7,1146.7 1271.7,1183.67 1283.03,1195 J1.1@1283.03,1504.47 ; J1.1 1283.03,1505.83 1284.39,1504.47 1305.53,1504.47 1365,1445 1435,1445 1470,1480 C_buck_1.2
  Top Layer w20: v1(445,1410) 430,1425 430,1495 655.87,1720.87 1005,1720.87 1113.06,1720.87 1281.89,1552.04 1281.89,1521.97 J1.1
  Top Layer w30: R_usb_2.1 977.95,1302.4 1025.55,1350 1035.71,1350 1065,1379.29 1065,1461.54 1005,1521.54 1005,1720.87
  Bottom Layer w10: U3.3 790.16,1332.43 813.06,1309.53 ; U2.8 872.11,1250.47 813.06,1309.53 ; U2.11 813.06,1309.53
  Bottom Layer w15: U2.5 1154.53,1250.47 v1(1265,1140)
  Bottom Layer w30: v1(445,1410) 714.88,1410 785.39,1339.49 786.82,1339.49 789.89,1336.43 U3.3@789.89,1335
boot0: R_boot_0.2 U1.44 | length 502.5
  Top Layer w10: U1.44 1094.53,850.47 1215,730 R_boot_0.2
boot1: R_boot_1.2 U1.20 | length 341.6
  Top Layer w10: U1.20 1552.09,909.53 R_boot_1.2
GND: A1.3 A1.11 C_buck2.2 C_buck_1.1 C_buck_3.2 C_buck_4.2 C_crystal_0.1 C_crystal_1.1 C_crystal_2.1 C_crystal_3.1 C_rst_0.1 CR_swd_0.2 J0.3 J0.5 J0.6 J1.4 J1.5 J1.Shell J2.5 J2.6 J3.1 L_buck_2.1 R_LED_0.2 SW_rst_0.4 U1.8 U1.23 U1.35 U1.47 U2.10 U2.12 U2.13 U3.1
  other v1: 1365,180 1435,365 1520,465 1090,980 1015,1400
  other v2: 157.72,157.72 1850.63,157.72 157.72,1614.41 1850.63,1614.41
L_x1: U2.2
L_x2: CR_buck_1.1 L_buck_2.2 U2.3 | length 470.4
  Bottom Layer w10: U2.3 1236.93,1289.84 1299.29,1227.48 L_buck_2.2
  Bottom Layer w30: L_buck_2.2 1381.24,1226.24 1558.48,1226.24 CR_buck_1.1
NetC_buck_6_2: C_buck_6.2 R_buck_6.1 | length 110.8
  Bottom Layer w30: C_buck_6.2 1450.22,1014.78 1560.41,1014.78 R_buck_6.1
NetCR_swd_0_1: CR_swd_0.1 J0.4 L_swd_0.1 | length 347.2
  Top Layer w10: J0.4 568.68,756.18 575,762.5 CR_swd_0.1
  Top Layer w30: J0.4 484.35,508.17 L_swd_0.1
NetDS_LED_0_2: DS_LED_0.2 R_LED_0.1 | length 98.9
  Top Layer w30: R_LED_0.1 889.74,1394.74 889.74,1296.59 DS_LED_0.2
NetDS_LED_1_2: DS_LED_1.2 R_LED_1.1 | length 98.9
  Top Layer w30: DS_LED_1.2 825.26,1296.59 825.26,1394.74 R_LED_1.1
NetJ0_1: J0.1 R_swd_0.1 | length 153.8
  Top Layer w30: J0.1 501.85,903.82 524.32,926.29 524.32,943.79 545.53,965 R_swd_0.1
NetJ0_2: J0.2 R_swd_1.1 | length 120.5
  Top Layer w30: J0.2 485.35,855.61 598.2,855.61 R_swd_1.1
NetJ1_2: J1.2 R_usb_0.2 | length 249.8
  Top Layer w15: R_usb_0.2 1188.94,1303.39 1257.44,1371.89 J1.2
NetJ1_3: J1.3 R_usb_1.2 | length 282.6
  Top Layer w15: R_usb_1.2 1083.94,1303.39 1231.85,1451.3 J1.3
NetJ2_3: J2.3 R_boot_1.1 | length 110.7
  Top Layer w10: R_boot_1.1 1645,893.39 J2.3
NetJ2_4: J2.4 R_boot_0.1 | length 206
  Top Layer w10: R_boot_0.1 1428.39,680 1523.39,585 J2.4
PA0: U1.10
PA1: U1.11
PA2: U1.12
PA3: A1.1 C_amp1.2 J3.2 R_AMP.2 U1.13 | length 2892.7
  Top Layer w15: J3.2 660,1515 600,1455 600,1159.9 669.9,1090 879.27,1090 933.55,1144.28 984.28,1144.28 v1(985,1145) ; U1.13 1282.5,771.73 1305.77,795 v1(1310,795)
  Bottom Layer w15: A1.1 676.5,191.5 773.03,191.5 C_amp1.2
  Bottom Layer w30: C_amp1.2 778.7,193.23 793.98,193.23 799.13,198.39 R_AMP.2 874.84,198.39 878.54,202.09 878.54,211.93 931.61,265 1145,265 1215,195 1305,195 1380,270 1380,725 v1(1310,795) 1195,795 970,1020 970,1064.59 981.17,1075.76 981.17,1141.17 v1(985,1145)
PA4: U1.14
PA5: U1.15
PA6: U1.16
PA7: U1.17
PA8: U1.29
PA9: U1.30
PA10: U1.31
PA11: R_usb_0.1 U1.32 | length 253.3
  Top Layer w10: U1.32 1035.97,1046.5 1035.97,1095.97 1146.66,1206.66 1165.04,1206.66 R_usb_0.1
PA12: R_usb_1.1 R_usb_2.2 U1.33 | length 312.6
  Top Layer w10: U1.33 1015.79,1105.16 1080,1169.38 R_usb_1.1
  Top Layer w15: R_usb_2.2 975.98,1226.61 R_usb_1.1
PA13: R_swd_0.2 U1.34 | length 432.3
  Top Layer w10: R_swd_0.2 791.57,965 931.57,1105 990.24,1105 996.1,1099.14 U1.34
PA14: R_swd_1.2 U1.37 | length 277.1
  Top Layer w10: R_swd_1.2 719.96,860 727,867.04 727,871.14 844.13,988.27 U1.37
PA15: U1.38
PB0: U1.18
PB1: U1.19
PB3: U1.39
PB4: U1.40
PB5: U1.41
PB6: U1.42
PB7: U1.43
PB8: U1.45
PB9: U1.46
PB10: U1.21
PB11: U1.22
PB12: U1.25
PB13: U1.26
PB14: U1.27
PB15: U1.28
PC13: R_LED_1.2 U1.2 | length 1143.3
  Top Layer w10: R_LED_1.2 764.49,1308.17 660,1203.68 660,1138.43 683.43,1115 845,1115 874.59,1144.59 v1(874.59,1145.41) ; v1(855.78,720.78) 855.78,719.22 900,675 966.37,675 975.92,684.54 975.92,713.5 U1.2
  Bottom Layer w10: v1(855.78,720.78) 855.78,1115.79 874.59,1134.59 v1(874.59,1145.41)
PC14_XTAL_IN: C_crystal_2.2 U1.3 X2.1 | length 439.6
  Top Layer w10: X2.1 671.5,773 773,773 789,757 789,721 855,655 969.85,655 995.6,680.76 995.6,713.5 U1.3
PC15_XTAL_OUT: C_crystal_3.2 U1.4 X2.2 | length 440
  Top Layer w10: X2.2 C_crystal_3.2@765,664 ; C_crystal_3.2 778.5,651.5 798.14,651.5 839.64,610 867.23,610 875.94,618.71 913.71,618.71 922.41,610 950,610 1015.29,675.29 1015.29,713.5 U1.4
Rs_low: A1.2 A301.1 C_amp1.1 R_AMP.1 | length 318.8
  Bottom Layer w15: A1.2 731.6,166 767.13,130.47 C_amp1.1 779.43,126.04 860.57,126.04 R_AMP.1 971.61,121.61 A301.1
RST: C_rst_0.2 R_rst_0.1 SW_rst_0.2 U1.7 | length 882
  Top Layer w10: U1.7 1075.34,713.5 1075.34,659.66 1125,610 1274.14,610 1505.56,378.58 1523.19,378.58
  Top Layer w20: R_rst_0.1 1447.48,292.05 1447.48,202.95 C_rst_0.2 ; R_rst_0.1@1444.53,299.92 1523.19,378.58 SW_rst_0.2
V_amp_ref: A301.0 C_buck_3.1 CR_buck_1.2 R_buck_5.2 R_buck_6.2 U2.4 | length 2406.2
  Bottom Layer w10: U2.4 1169.84,1270.16 1260,1180 1575.35,1180 1634.45,1120.91 R_buck_5.2
  Bottom Layer w30: A301.0 1465,125 1705,365 1705,949.37 1652.91,1001.46 1647.99,1001.46 1639.37,1010.08 R_buck_6.2 ; C_buck_3.1 1552.92,923.63 1636.91,1007.62 1636.91,1112.54 R_buck_5.2 ; R_buck_5.2@1634.45,1120.91 1650.28,1136.73 CR_buck_1.2
V_fb1: U2.9
V_fb2: C_buck_6.1 R_buck_4.2 R_buck_5.1 U2.6 | length 542.1
  Bottom Layer w10: U2.6 1139.21,1230.79 1220,1150 1220,1121.21 1253.81,1087.4 R_buck_4.2
  Bottom Layer w40: R_buck_4.2 1345.98,1086.42 1449.02,1086.42 C_buck_6.1 1541.89,1085.43 1565.55,1109.09 R_buck_5.1
V_ref: C_buck_4.1 R_buck_4.1 U2.7 | length 520.8
  Bottom Layer w10: U2.7 1017.23,1230.79 1017.23,1217.77 1040,1195 1120.87,1195 1280.87,1035 1322.6,1035 R_buck_4.1
  Bottom Layer w40: C_buck_4.1 R_buck_4.1
XTAL_IN: C_crystal_0.2 R_crystal_0.1 U1.5 X1.1 | length 495.5
  Top Layer w10: X1.1@854.48,365 885.75,365 922.25,401.5 C_crystal_0.2 R_crystal_0.1 1013.11,604.84 1035.47,627.2 U1.5
XTAL_OUT: C_crystal_1.2 R_crystal_0.2 U1.6 X1.2 | length 494.5
  Top Layer w10: U1.6 1055.16,627.75 1078.07,604.84 R_crystal_0.2@1078.07,551.56 ; R_crystal_0.2 C_crystal_1.2 1164.21,401.5 1200.71,365 X1.2@1231.98,365
pads on no net: A1.5 A1.6 A1.7 A1.8 A1.9 A1.10 A1.12 A1.13 A1.14 J1.MH1 J1.MH2 SW_rst_0.1 SW_rst_0.3 U1.1 U2.1

## Polygon pours and split planes (outlines as drawn)
GND on Bottom Layer "GND_L02_P003" (solid, pour order 3): 145,1890 105,1890 0,1785 0,0 2235,0 2115,120 2115,1925
3v3 on Bottom Layer "3V3_L02_P000" (solid, pour order 0): 615,1240 585,1210 585,1125 620,1090 680,1090 680,1020 695,1005 745,1005 770,1030 770,1240
GND on Top Layer "GND_L01_P002" (solid, pour order 2): 55,1915 0,1860 0,0 2370,0 2205,165 2205,1895

## Keep-outs
Keep-Out Layer:
  the board outline again, w0.5

## Silkscreen, mask and mechanical layers (free items; w line width, h text height)
Mechanical 1:
  the board outline again, w0.5

## Text inside footprints (layer, text, board x,y; h text height)
CR_buck_1: Mechanical 13 "*" at 1568.05,1250 h50 r180; Bottom Overlay "*" at 1510.35,1250 h50 r180
J1: Top 3D Body "PCB Edge" at 1283.03,1764.92 h16 r180
U1: Top Overlay "*" at 956.89,647.5 h50 r90; Mechanical 13 "*" at 971.89,741 h50 r90